# Altium PCB C2Sv1 OV7670 Breakout.PcbDoc
Units mm, origin at the board's own origin, x right, y up, seen from the top; angles counter-clockwise.
Board outline 35 x 34 mm, 2 copper layers (Top Layer, Bottom Layer), stack 1.57 mm thick; 2 components, 18 nets, 52 pads, 51 vias.
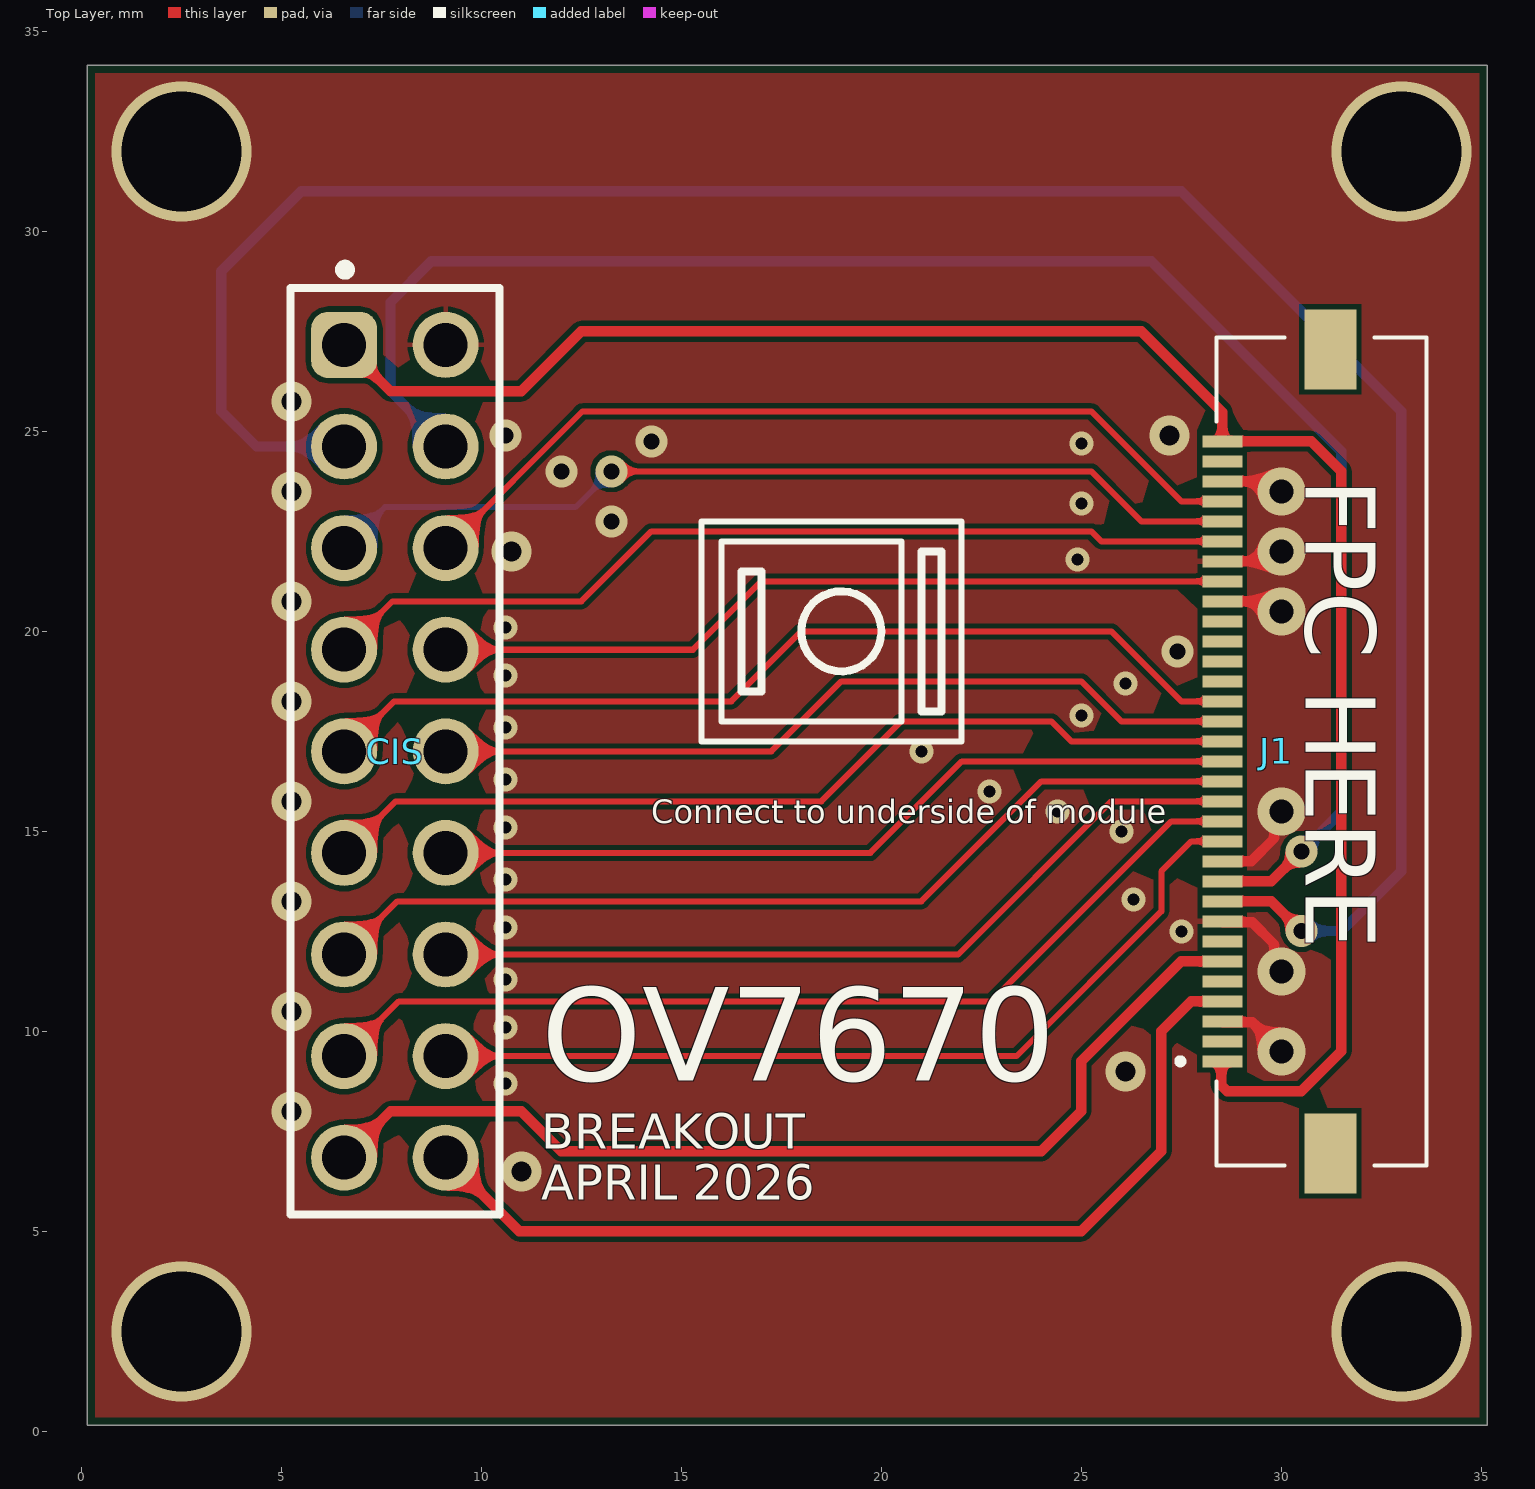
[diagram p0: Top Layer view]
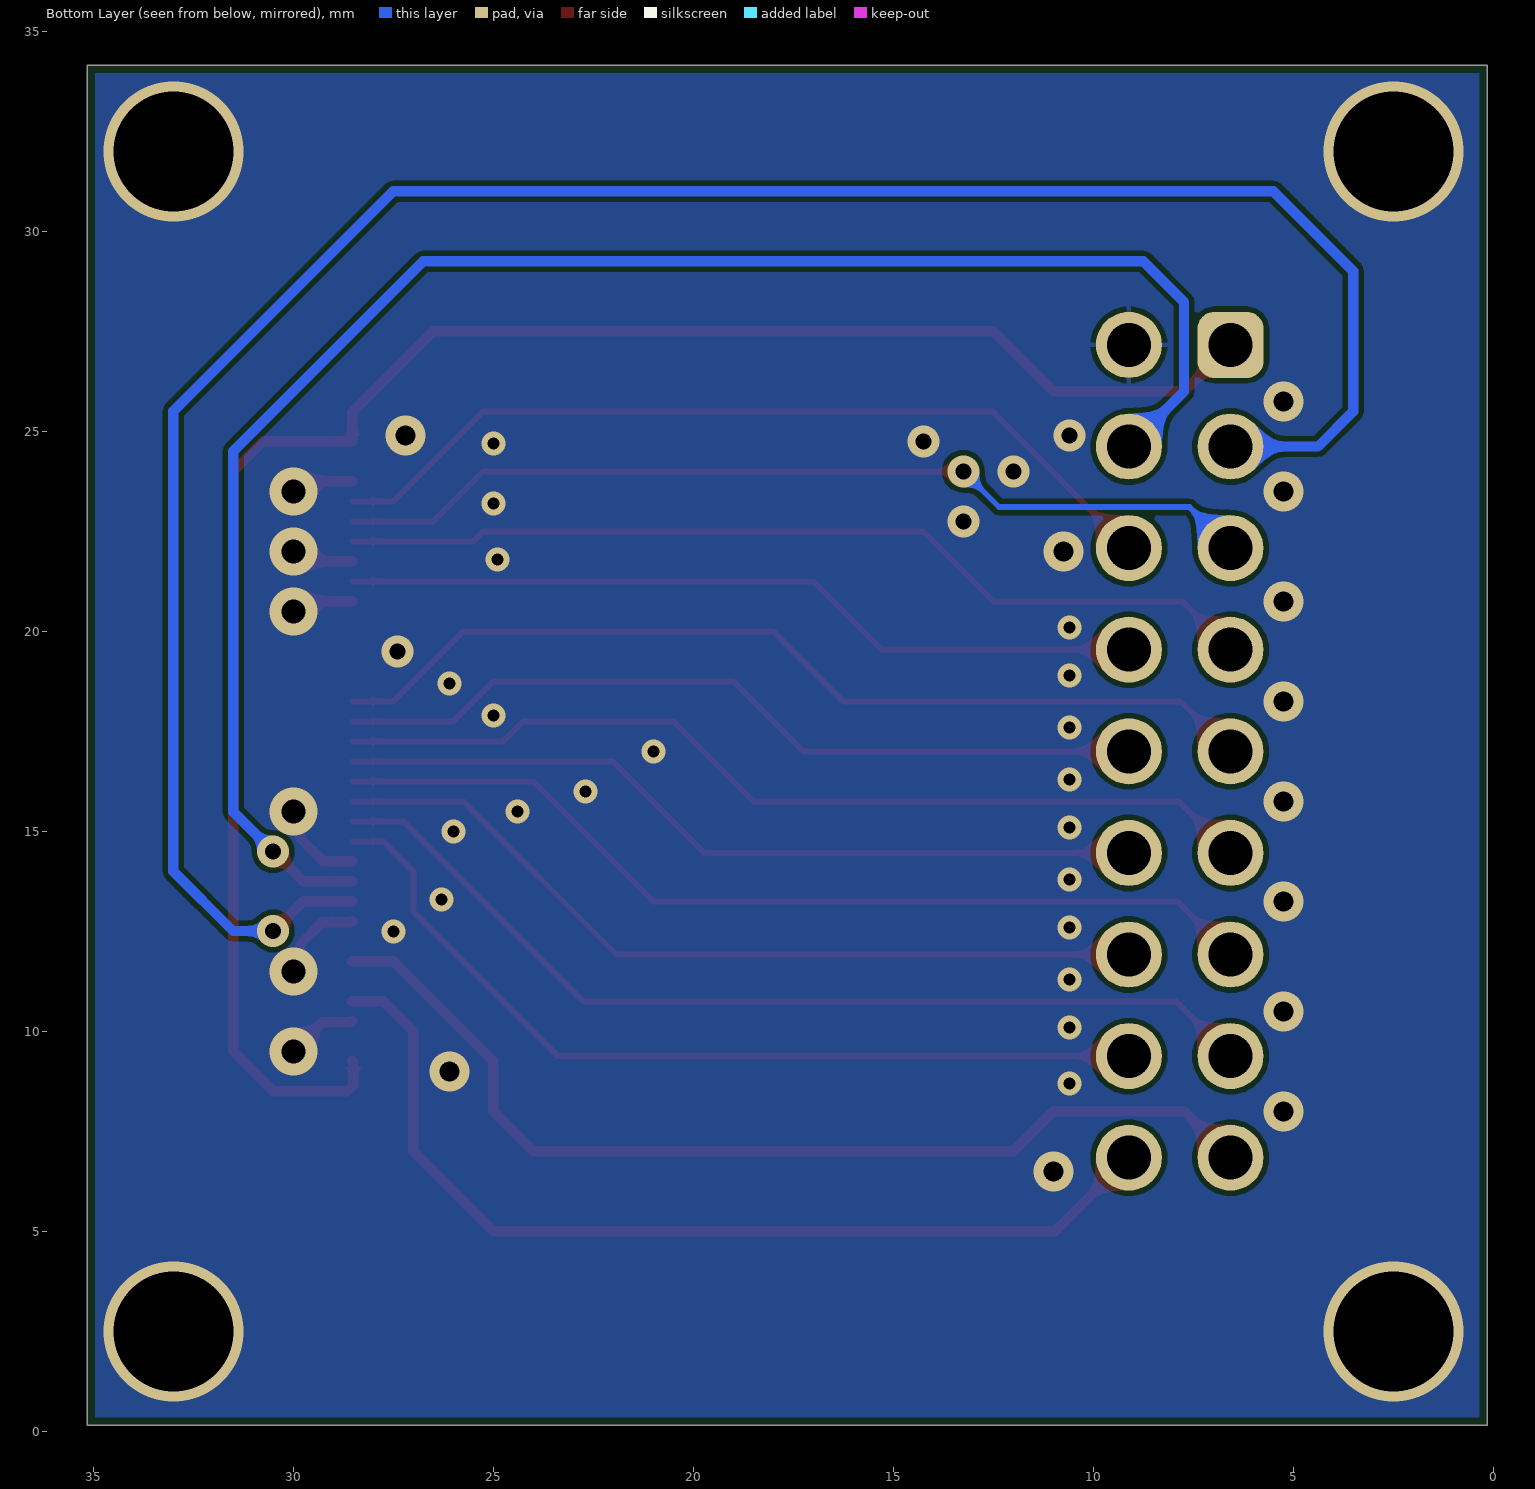
[diagram p1: Bottom Layer view, seen from below]

## Layer stack, top to bottom
Top Solder: solder mask 0.0127, Solder Resist, Dk 3.8
Top Layer: signal copper 0.035
Dielectric: core 1.5, FR-4, Dk 4.5
Bottom Layer: signal copper 0.035
Bottom Solder: solder mask 0.0127, Solder Resist, Dk 3.8

## Board outline
0.15,0.15 0.15,34.15 35.15,34.15 35.15,0.15

## Design rules (kind name [scope] priority, off if disabled: settings)
BoardOutlineClearance [All] p1: gap=0.2 ignorepadtopadclearanceinfootprint=FALSE
Clearance [All] p1: gap=0.127 ignorepadtopadclearanceinfootprint=FALSE except(0.25: Arc-Hole Track-Hole SMDPad-Hole THPad-Hole Via-Hole Fill-Hole Poly-Hole Region-Hole Text-Hole)
ComponentClearance [All] p1: gap=0.127 collisioncheckmode=3 verticalgap=0.127 showdistances=TRUE
DiffPairsRouting [All] p1: maxlimit=0.254 minlimit=0.127 mostfreqgap=0.127 toplayer_minwidth=0.127 toplayer_maxwidth=25.4 toplayer_prefwidth=0.127 bottomlayer_minwidth=0.127 bottomlayer_maxwidth=25.4 bottomlayer_prefwidth=0.127 maxuncoupledlength=12.7
Height [All] p1: minheight=0 maxheight=1816.048 prefheight=12.7
HoleSize [All] p1: absolutevalues=TRUE maxlimit=6.3 minlimit=0.3 maxpercent=80.000 minpercent=20.000
HoleToHoleClearance [All] p1: gap=0.25 allowstackedmicrovias=FALSE
MatchedLengths DCMI [InNetClass('DCMI')] p1: tolerance=5 checknetsindiffpair=FALSE checkdiffpairvsdiffpair=TRUE checkxsignals=TRUE checkothers=TRUE
MinimumAnnularRing [All] p1: minimumring=0.076
MinimumSolderMaskSliver [All] p1: minsoldermaskwidth=0
PlaneClearance [All] p1: clearance=0.127
PlaneConnect PlaneConnectPowerPads [InPadClass('PowerPads')] p1: planeconnectstyle=Direct reliefexpansion=0.508 reliefentries=4 reliefconductorwidth=0.254 reliefairgap=0.254
PlaneConnect [All] p2: pad.planeconnectstyle=Relief pad.reliefexpansion=0.3 pad.reliefentries=4 pad.reliefconductorwidth=0.127 pad.reliefairgap=0.127 via.planeconnectstyle=Direct via.reliefexpansion=0.3 via.reliefentries=4 via.reliefconductorwidth=0.127 via.reliefairgap=0.127
PolygonConnect PolygonConnectPowerPads [All vs (InPadClass('PowerPads'))] p1: connectstyle=Direct reliefconductorwidth=0.254 reliefentries=4 polygonreliefangle="90 Angle" airgapwidth=0.254
PolygonConnect [All] p2: thpad.connectstyle=Relief thpad.reliefconductorwidth=0.127 thpad.reliefentries=4 thpad.polygonreliefangle="90 Angle" thpad.airgapwidth=0.127 smdpad.connectstyle=Relief smdpad.reliefconductorwidth=0.127 smdpad.reliefentries=4 smdpad.polygonreliefangle="90 Angle" smdpad.airgapwidth=0.127 via.connectstyle=Direct via.reliefconductorwidth=0.127 via.reliefentries=4 via.polygonreliefangle="90 Angle" via.airgapwidth=0.127
RoutingVias [All] p1: holewidth=0.3 width=0.6 viastyle="Through Hole" minholewidth=0.3 minwidth=0.6 maxholewidth=0.6 maxwidth=6.6
SilkToSilkClearance [All] p1: silktosilkclearance=0
SilkToSolderMaskClearance [IsPad] p1: minsilkscreentomaskgap=0.127 clearancetoexposedcopper=TRUE
SolderMaskExpansion SME_Via [IsVia] p1: expansion=0 istentingtop=TRUE
SolderMaskExpansion [All] p2: expansion=0.04 istentingtop=FALSE
SupplyNets "Schematic Supply Nets" [InNet('GND')] p1: voltage=0.000
SupplyNets "Schematic Supply Nets_3" [InNet('3V3')] p2: voltage=0.000
Width [All] p1: maxlimit=0.254 minlimit=0.102 preferedwidth=0.254
20 further rules are at their usual default settings.

## Classes and differential pairs
net class DCMI: DCMI_D0 DCMI_D1 DCMI_D2 DCMI_D3 DCMI_D4 DCMI_D5 DCMI_D6 DCMI_D7 FRAME_VALID LINE_VALID PIX_CLK XCLK

## Components (designator, comment, footprint, x,y, rotation, side; value= is the part's Value field where it differs from the comment)
CIS "61301821121" 61301821121 7.84,17 r270 top locked
J1 "505110-3291" 5051103291 31,17 r90 top locked

## Footprints (in the part's own frame and the unit in brackets; to place one, negate y for a bottom-side part, rotate by r counter-clockwise, add the part's x,y. Pads: shape width x height; smd on the part's side, far side on the other; paste and mask are expansions set on the pad)
5051103291 [mm]
  rect 0.3x1 smd: 1(-7.75,2.475) 2(-7.25,2.475) 3(-6.75,2.475) 4(-6.25,2.475) 5(-5.75,2.475) 6(-5.25,2.475) 7(-4.75,2.475) 8(-4.25,2.475) 9(-3.75,2.475) 10(-3.25,2.475) 11(-2.75,2.475) 12(-2.25,2.475) 13(-1.75,2.475) 14(-1.25,2.475) 15(-0.75,2.475) 16(-0.25,2.475) 17(0.25,2.475) 18(0.75,2.475) 19(1.25,2.475) 20(1.75,2.475) 21(2.25,2.475) 22(2.75,2.475) 23(3.25,2.475) 24(3.75,2.475) 25(4.25,2.475) 26(4.75,2.475) 27(5.25,2.475) 28(5.75,2.475) 29(6.25,2.475) 30(6.75,2.475) 31(7.25,2.475) 32(7.75,2.475)
  rect 2x1.3 smd: MP1(-10.05,-0.225) MP2(10.05,-0.225)
  silkscreen extent -10.35,-2.63 10.35,3.57, body extent -10.75,-2.47 10.75,2.83, height 1.9
61301821121 [mm] "Pin Header, pitch 2.54 mm, THT, Vertical, dual row, 18p"
  rrect50% 1.65x1.65 hole 1.1: 1(-10.16,-1.27)
  round 1.65 hole 1.1: 2(-10.16,1.27) 3(-7.62,-1.27) 4(-7.62,1.27) 5(-5.08,-1.27) 6(-5.08,1.27) 7(-2.54,-1.27) 8(-2.54,1.27) 9(0,-1.27) 10(0,1.27) 11(2.54,-1.27) 12(2.54,1.27) 13(5.08,-1.27) 14(5.08,1.27) 15(7.62,-1.27) 16(7.62,1.27) 17(10.16,-1.27) 18(10.16,1.27)
  silkscreen extent -12.16,-2.62 11.58,2.62, body extent -11.43,-2.54 11.43,2.54, height 8.59

## Part data
CIS: library part CMP-096-000238-1, "WR-PHD Pin Header, THT, Vertical, pitch 2.54mm, 2 Row, 18P", Contact Resistance=20mOhm, Manufacturer="Wurth Elektronik", Operating Temperature Max=105°C, Operating Temperature Min=-40°C, Rated Current=3A, Withstanding Voltage=500V, Working Voltage=250V, Category="Board-to-Board Connectors", Component Type=Standard, ComponentLink1Description="Website Link", ComponentLink1URL=https://www.we-online.com/redexpert/article/61301821121?ad, ComponentLink2Description="Datasheet Link", ComponentLink2URL=https://www.we-online.com/redexpert/spec/61301821121?ad, Design Item ID=61301821121, Gender="Pin Header", Manufacturer Part Number=61301821121, Match Code=WR-PHD, Mount="Through Hole", Number of Pins=18, Number of Rows=2, Orientation=Vertical, Packaging=Bag, Pin Count=18, Pitch=2.54mm, Source=WR-PHD.SchLib
J1: library part CMP-220-000001-1, "Easy-On FFC/FPC Connector", Manufacturer_Name=Molex, Mouser Part Number=538-505110-3291, Added By="Felix Abbott", Datasheet Link=https://www.molex.com/pdm_docs/sd/5051103291_sd.pdf, Design Item ID=505110-3291, Height=4.06mm, Manufacturer_Part_Number=505110-3291, Mouser Price/Stock=https://www.mouser.co.uk/ProductDetail/Molex/505110-3291?qs=0lSvoLzn4L9xGyl4KYdheA%3D%3D, Source=Schlib1.SchLib

## Via types
v1: diameter 0.6, hole 0.3, Top Layer to Bottom Layer, tented both sides, 21 vias
v2: diameter 1, hole 0.5, Top Layer to Bottom Layer, tented both sides, 12 vias
v3: diameter 0.8, hole 0.4, Top Layer to Bottom Layer, tented both sides, 8 vias
v4: diameter 1.2, hole 0.6, Top Layer to Bottom Layer, tented both sides, 6 vias
v5: diameter 3.5, hole 3, Top Layer to Bottom Layer, 4 vias

## Nets (pads, with @x,y where several pads share a name; then routed paths per layer and width w, separated by ;. In a path a pad name is that pad's centre, name@x,y a point inside that pad or via, vN(x,y) a via of type N, cw(c..) or ccw(c..) an arc to the next point about the centre after c; other vN are vias at no path point)
3V3: CIS.1 J1.1 J1.32 | length 46.5
  Top Layer w0.254: CIS.1 7.73,26 11,26 12.5,27.5 26.5,27.5 28.525,25.475 J1.32 30.75,24.75 31.5,24 31.5,9.5 30.5,8.5 28.649,8.5 28.5,8.649 28.5,9.227 J1.1 J1.1
DCMI_D0: CIS.16 J1.12 | length 22.2
  Top Layer w0.152: CIS.16 23.38,9.38 27,13 27,14 27.75,14.75 J1.12
DCMI_D1: CIS.15 J1.13 | length 24.4
  Top Layer w0.152: CIS.15 7.94,10.75 22.75,10.75 27.25,15.25 J1.13
DCMI_D2: CIS.14 J1.14 | length 21
  Top Layer w0.152: CIS.14 21.92,11.92 25.75,15.75 J1.14
DCMI_D3: CIS.13 J1.15 | length 23.7
  Top Layer w0.152: CIS.13 7.9,13.25 21,13.25 24,16.25 J1.15
DCMI_D4: CIS.12 J1.16 | length 20.4
  Top Layer w0.152: CIS.12 19.723,14.46 22.013,16.75 J1.16
DCMI_D5: CIS.11 J1.17 | length 23.5
  Top Layer w0.152: CIS.11 7.86,15.75 18.5,15.75 20.5,17.75 24.25,17.75 24.75,17.25 J1.17
DCMI_D6: CIS.10 J1.18 | length 20.6
  Top Layer w0.152: CIS.10 17.25,17 19,18.75 25,18.75 26,17.75 J1.18
DCMI_D7: CIS.9 J1.19 | length 23.9
  Top Layer w0.152: CIS.9 7.82,18.25 16.25,18.25 18,20 25.75,20 27.5,18.25 J1.19
FRAME_VALID: CIS.5 J1.28 | length 23.3
  Top Layer w0.152: v3(13.25,24) 25.25,24 26.5,22.75 J1.28
  Bottom Layer w0.152: CIS.5 7.598,23.108 12.358,23.108 v3(13.25,24)
GND: CIS.2 J1.3 J1.8 J1.11 J1.24 J1.26 J1.30 | length 11.1
  Top Layer w0.254: J1.3 28.548,10.227 29.273,10.227 v4(30,9.5) ; J1.8 28.548,12.727 29.273,12.727 29.819,12.181 29.819,11.681 v4(30,11.5) ; J1.11 29.25,14.25 29.819,14.819 29.819,15.319 v4(30,15.5) ; J1.24 29.494,20.75 29.744,20.5 v4(30,20.5) ; J1.26 29.494,21.75 29.744,22 v4(30,22) ; J1.30 29.494,23.75 29.744,23.5 v4(30,23.5)
  other v1: 10.6,8.7 10.6,10.1 10.6,11.3 27.5,12.5 10.6,12.6 26.3,13.3 10.6,13.8 26,15 10.6,15.1 24.4,15.5 22.7,16 10.6,16.3 21,17 10.6,17.6 25,17.9 26.1,18.7 10.6,18.9 10.6,20.1 24.9,21.8 25,23.2 25,24.7
  other v2: 11,6.5 5.25,8 26.1,9 5.25,10.5 5.25,13.25 5.25,15.75 5.25,18.25 5.25,20.75 10.75,22 5.25,23.5 27.2,24.9 5.25,25.75
  other v3: 27.4,19.5 13.25,22.75 12,24 14.25,24.75 10.6,24.9
  other v5: 2.5,2.5 33,2.5 2.5,32 33,32
LINE_VALID: CIS.6 J1.29 | length 21.8
  Top Layer w0.152: CIS.6 12.53,25.5 25.25,25.5 27.5,23.25 J1.29
PIX_CLK: CIS.7 J1.27 | length 23.3
  Top Layer w0.152: CIS.7 7.78,20.75 12.5,20.75 14.25,22.5 25.25,22.5 25.5,22.25 J1.27
PWRDWN: CIS.18 J1.4 | length 24.3
  Top Layer w0.254: CIS.18 10.95,5 25,5 27,7 27,10 27.75,10.75 J1.4
RESETBAR: CIS.17 J1.6 | length 25.5
  Top Layer w0.254: CIS.17 7.73,8 11,8 12,7 24,7 25,8 25,9.25 27.5,11.75 J1.6
SCL: CIS.3 J1.9 | length 56.4
  Top Layer w0.254: J1.9 29.75,13.25 30.492,12.508 v3(30.504,12.508)
  Bottom Layer w0.254: CIS.3 4.38,24.62 3.5,25.5 3.5,29 5.5,31 27.5,31 33,25.5 33,14 31.508,12.508 v3(30.504,12.508)
SDA: CIS.4 J1.10 | length 43
  Top Layer w0.254: J1.10 29.75,13.75 30.492,14.492 v3(30.504,14.492)
  Bottom Layer w0.254: CIS.4 7.73,26 7.73,28.23 8.75,29.25 26.75,29.25 31.5,24.5 31.5,15.488 v3(30.504,14.492)
XCLK: CIS.8 J1.25 | length 20.1
  Top Layer w0.152: CIS.8 15.29,19.54 17,21.25 J1.25
pads on no net: J1.2 J1.5 J1.7 J1.20 J1.21 J1.22 J1.23 J1.31 J1.MP1 J1.MP2

## Polygon pours and split planes (outlines as drawn)
GND on Bottom Layer "NONET_L-01_P-001" (solid, pour order 9): 0.15,0 35.15,0 35.15,34.15 0.15,34.15
GND on Top Layer "NONET_L-01_P-001" (solid, pour order 15): 0,34 0,0 35,0 35,34

## Silkscreen, mask and mechanical layers (free items; w line width, h text height)
Top Overlay:
  circle w0.2: c19,20 r1
  lines w0.15: 15.5,17.25 22,17.25 22,22.75 15.5,22.75 15.5,17.25 ; 16,17.75 20.5,17.75 20.5,22.25 16,22.25 16,17.75
  lines w0.2: 16.5,18.5 17,18.5 17,21.5 16.5,21.5 16.5,18.5 ; 21,18 21.5,18 21.5,22 21,22 21,18
  text "FPC HERE" at 30.035,23.809 h3 r270
  text "Connect to underside of module" at 14.25,15 h1
  text "OV7670" at 11.5,8 h4
  text "BREAKOUT" at 11.5,6.781 h1.5
  text "APRIL 2026" at 11.5,5.5 h1.5
Board Shape:
  the board outline again, w0.3